# Altium PCB Unit.PcbDoc
Units mil, origin at the board's own origin, x right, y up, seen from the top; angles counter-clockwise.
Board outline 6000 x 4000 mil, 2 copper layers (Top Layer, Bottom Layer); 15 components, 19 nets, 271 pads, 0 vias.
Unrouted connection lines stored in the file: 45.
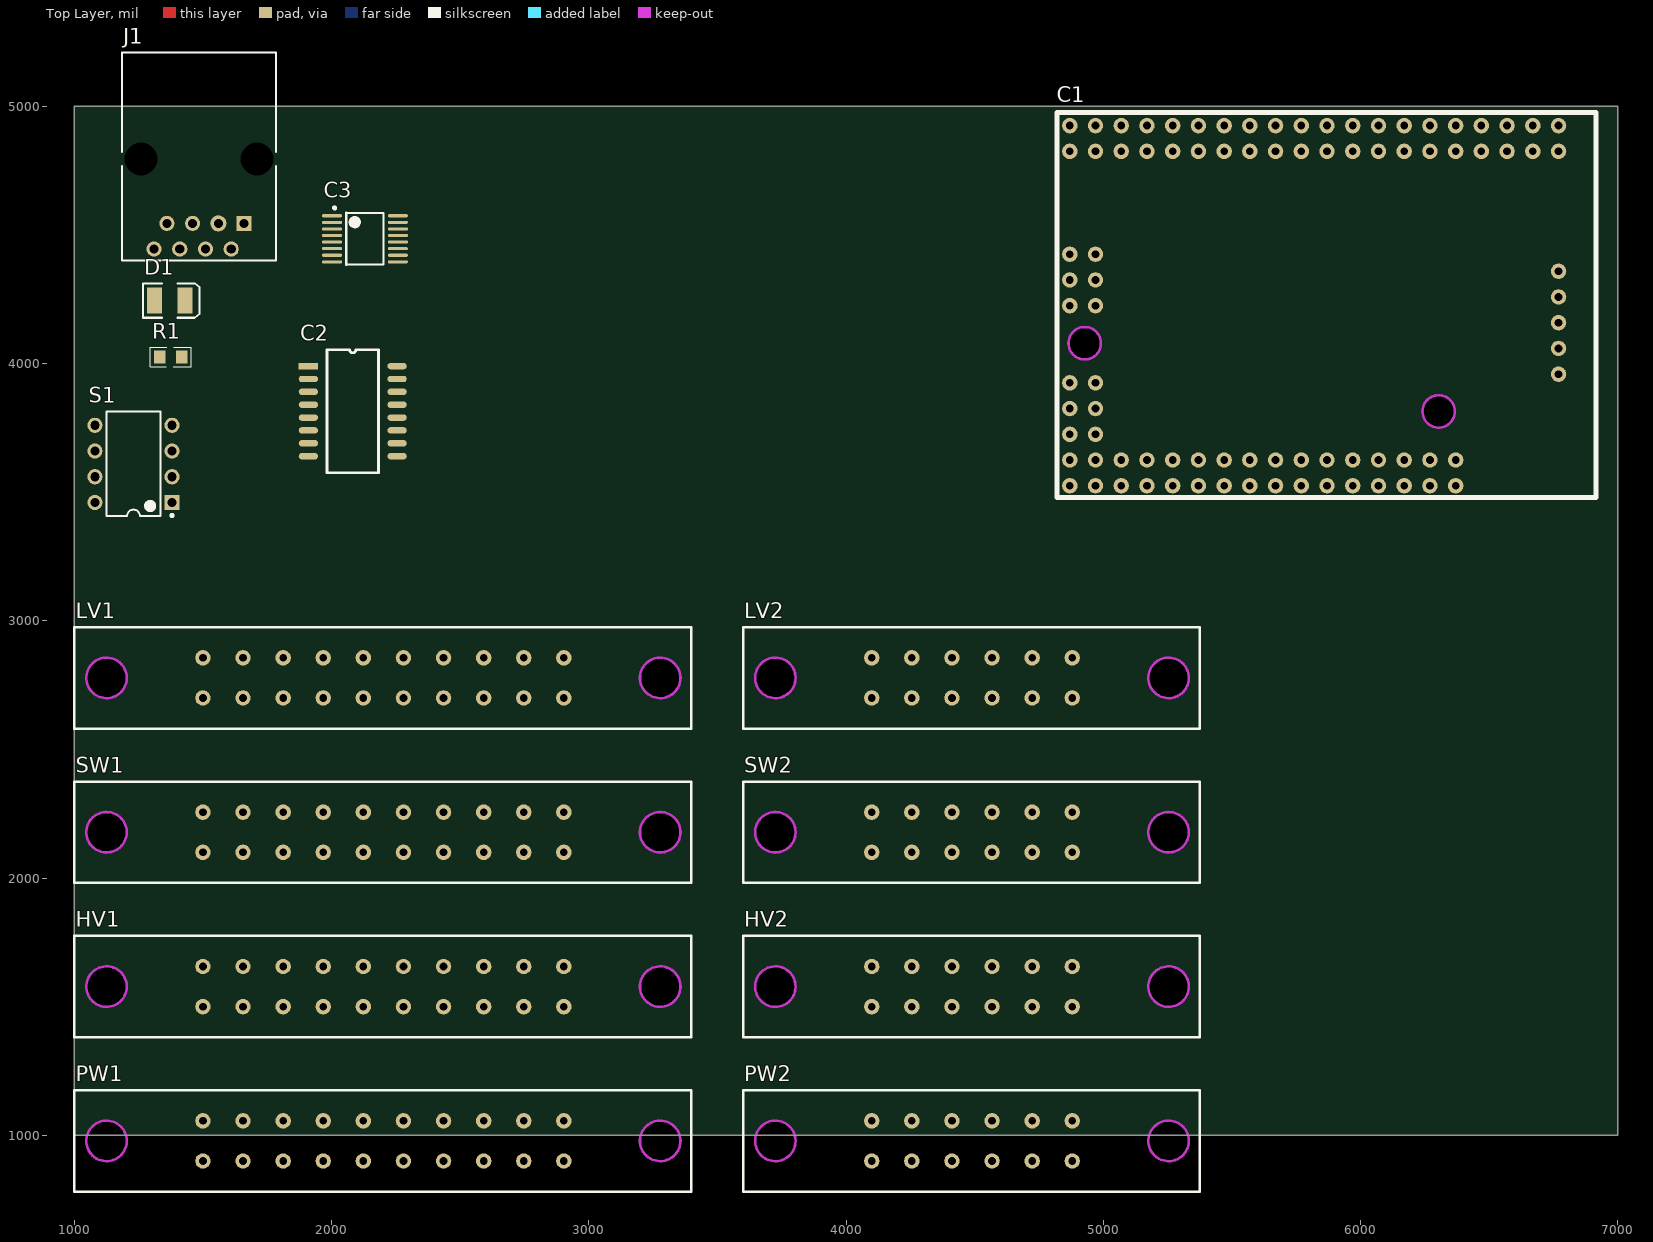
[diagram p0: Top Layer view]
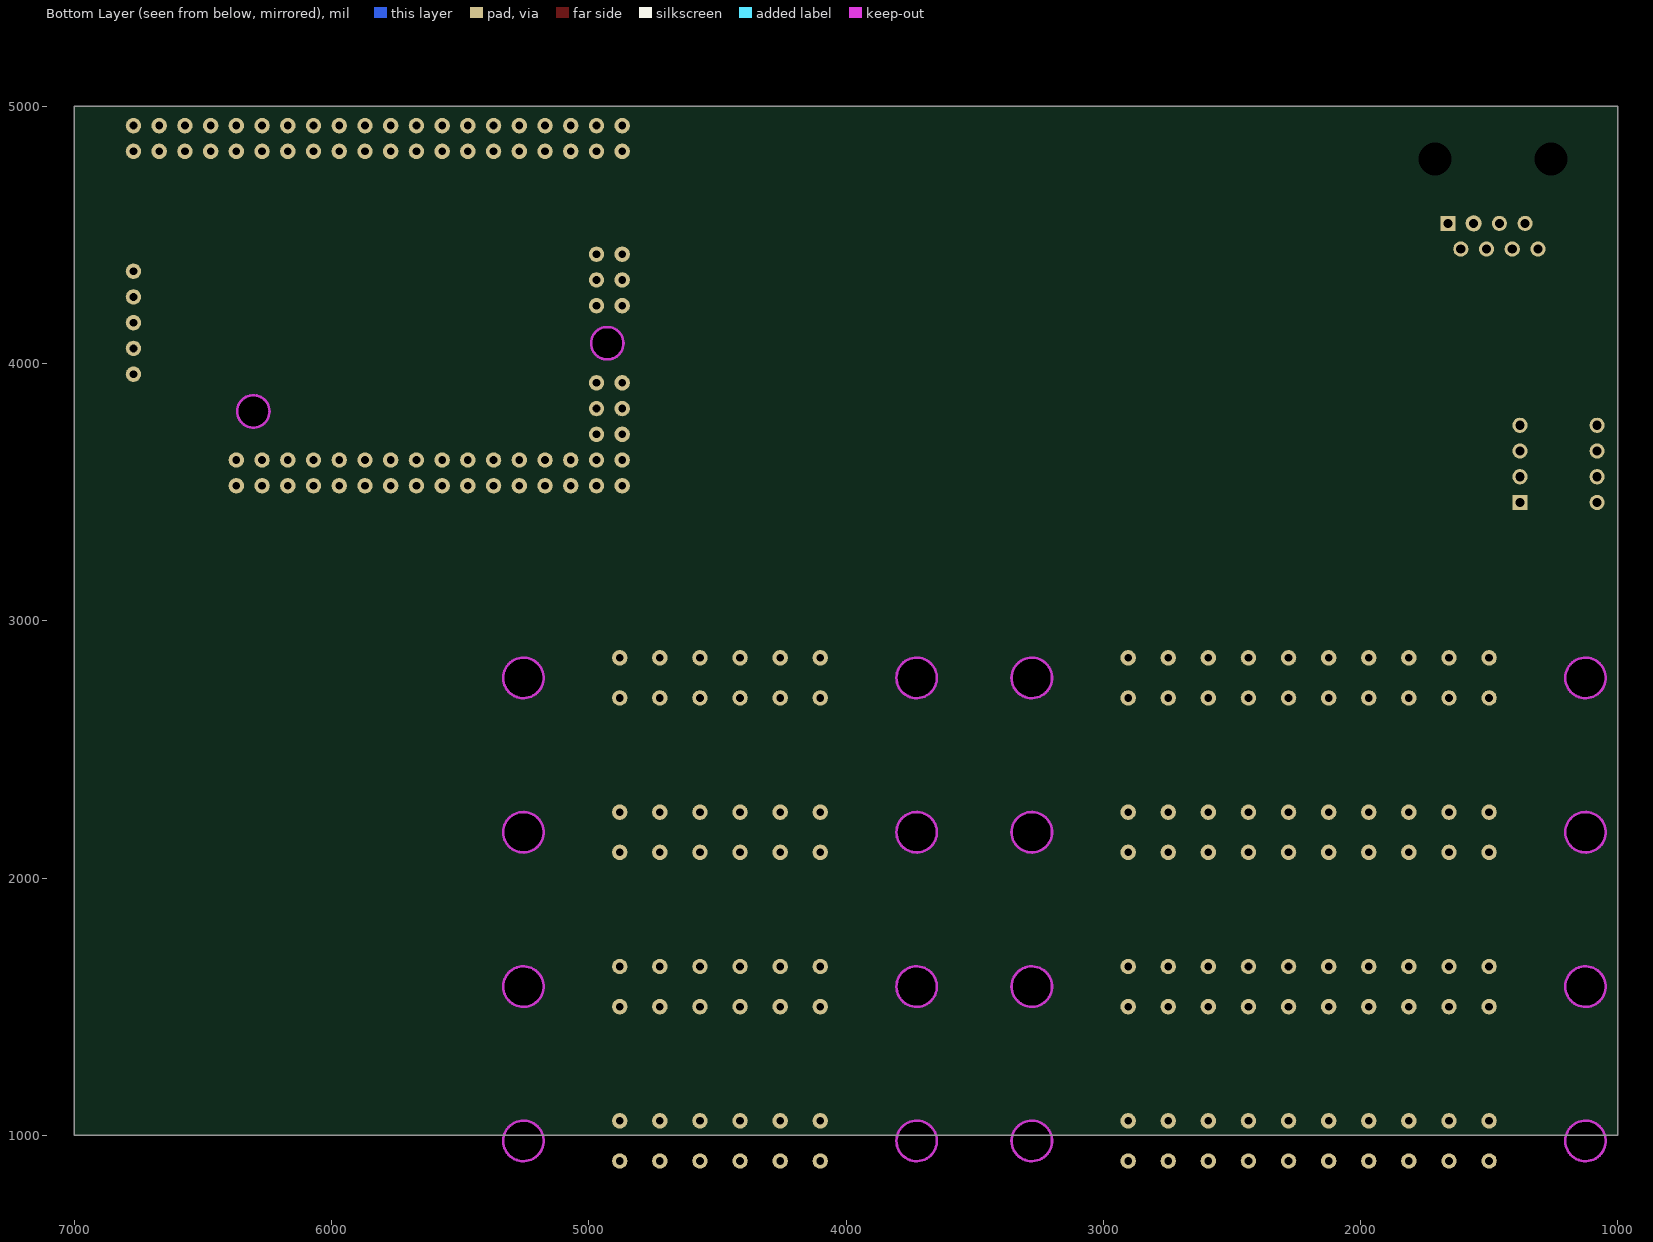
[diagram p1: Bottom Layer view, seen from below]

## Layer stack, top to bottom
Top Solder: solder mask 0.4, Solder Resist, Dk 3.5
Top Layer: signal copper 1.4
Dielectric 1: dielectric 12.6, FR-4, Dk 4.8
Bottom Layer: signal copper 1.4
Bottom Solder: solder mask 0.4, Solder Resist, Dk 3.5

## Board outline
1000,1000 7000,1000 7000,5000 1000,5000

## Design rules (kind name [scope] priority, off if disabled: settings)
Clearance [All] p1: gap=10 ignorepadtopadclearanceinfootprint=FALSE except(0: Arc-Hole Track-Hole SMDPad-Hole THPad-Hole Via-Hole Fill-Hole Poly-Hole Region-Hole Text-Hole)
PolygonConnect [All] p1: connectstyle=Relief reliefconductorwidth=10 reliefentries=4 polygonreliefangle="90 Angle" airgapwidth=10
RoutingVias [All] p1: holewidth=28 width=50 viastyle="Through Hole" minholewidth=28 minwidth=50 maxholewidth=28 maxwidth=50
SolderMaskExpansion [All] p1: expansion=4
Width [All] p1: maxlimit=10 minlimit=10 preferedwidth=10
30 further rules are at their usual default settings.

## Components (designator, comment, footprint, x,y, rotation, side; value= is the part's Value field where it differs from the comment)
C1 "Mega 2560 mini" "Mega 2560 mini" 4870,4925 r270 top
C2 "MAX3095" SOP16 1910,3990 r0 top
C3 "MAX3045" TSSOP-16 2130,4485 r0 top
D1 "LED3" 3.5X2.8X1.9 1370.94,4245 r0 top
HV1 "BTB-805-20P" BTB-805-20P 1500,1500 r0 top
HV2 "BTB-805-12P" BTB-805-12P 4100,1500 r0 top
J1 "15-43-6233" 15-43-6233 1485,5210 r180 top
LV1 "BTB-805-20P" BTB-805-20P 1500,2700 r0 top
LV2 "BTB-805-12P" BTB-805-12P 4100,2700 r0 top
PW1 "BTB-805-20P" BTB-805-20P 1500,900 r0 top
PW2 "BTB-805-12P" BTB-805-12P 4100,900 r0 top
R1 "0.33k" R0805 1375,4025 r0 top
S1 "SW-DIP4" DIP-8 1230,3610 r180 top
SW1 "BTB-805-20P" BTB-805-20P 1500,2100 r0 top
SW2 "BTB-805-12P" BTB-805-12P 4100,2100 r0 top

## Footprints (in the part's own frame and the unit in brackets; to place one, negate y for a bottom-side part, rotate by r counter-clockwise, add the part's x,y. Pads: shape width x height; smd on the part's side, far side on the other; paste and mask are expansions set on the pad)
3.5X2.8X1.9 [mm] "SM LED; 2 C-Bend Leads; Body 3.5 x 2.8 x 1.9 mm, inc leads (LxWxH typ)"
  rect 1.5x2.6 smd: 1(-1.5,0) 2(1.5,0)
  silkscreen extent -2.65,-1.7 2.95,1.7
15-43-6233 [mm] "Connector; PCB Jack, Thru-Hole; 1-Port; Unshielded without Lightpipes; Right Angle"
  rect 1.5x1.5 hole 0.9: 1(-4.445,16.89)
  round 1.5 hole 0.9: 2(-3.175,19.43) 4(-0.635,19.43) 5(0.635,16.89) 6(1.905,19.43) 7(3.175,16.89) 8(4.445,19.43)
  round 1.6 hole 0.9: 3(-1.905,16.89)
  round 2.95 hole 3.25 unplated: MH1(-5.715,10.54) MH2(5.715,10.54)
  silkscreen extent -7.62,0 7.62,20.58
BTB-805-12P [mil]
  round 60 hole 30: 1(0,0) 2(0,155.91) 3(155.91,0) 4(155.91,155.91) 5(311.81,0) 6(311.81,155.91) 7(467.72,0) 8(467.72,155.91) 9(623.62,0) 10(623.62,155.91) 11(779.53,0) 12(779.53,155.91)
  Keep-Out Layer board cut-out: 1075.39,77.95 1081.39,47.82 1098.46,22.28 1124,5.21 1154.13,-0.79 1154.13,-0.79 1184.27,5.21 1209.81,22.28 1226.88,47.82 1232.87,77.95 1232.87,77.95 1226.88,108.09 1209.81,133.63 1184.27,150.7 1154.13,156.69 1154.13,156.69 1124,150.7 1098.46,133.63 1081.39,108.09 1075.39,77.95
  Keep-Out Layer board cut-out: -374.61,-0.79 -404.74,5.21 -430.28,22.28 -447.35,47.82 -453.35,77.95 -453.35,77.95 -447.35,108.09 -430.28,133.63 -404.74,150.7 -374.61,156.69 -374.61,156.69 -344.47,150.7 -318.93,133.63 -301.86,108.09 -295.87,77.95 -295.87,77.95 -301.86,47.82 -318.93,22.28 -344.47,5.21 -374.61,-0.79
  Keep-Out Layer circle w10: c-374.61,77.95 r78.74
  Keep-Out Layer circle w10: c1154.13,77.95 r78.74
  silkscreen extent -500,-119 1275,275
BTB-805-20P [mil]
  round 60 hole 30: 1(0,0) 2(0,155.91) 3(155.91,0) 4(155.91,155.91) 5(311.81,0) 6(311.81,155.91) 7(467.72,0) 8(467.72,155.91) 9(623.62,0) 10(623.62,155.91) 11(779.53,0) 12(779.53,155.91) 13(935.43,0) 14(935.43,155.91) 15(1091.34,0) 16(1091.34,155.91) 17(1247.24,0) 18(1247.24,155.91) 19(1403.15,0) 20(1403.15,155.91)
  Keep-Out Layer board cut-out: -374.61,-0.79 -404.74,5.21 -430.28,22.28 -447.35,47.82 -453.35,77.95 -453.35,77.95 -447.35,108.09 -430.28,133.63 -404.74,150.7 -374.61,156.69 -374.61,156.69 -344.47,150.7 -318.93,133.63 -301.86,108.09 -295.87,77.95 -295.87,77.95 -301.86,47.82 -318.93,22.28 -344.47,5.21 -374.61,-0.79
  Keep-Out Layer board cut-out: 1699.02,77.95 1705.01,47.82 1722.08,22.28 1747.62,5.21 1777.76,-0.79 1777.76,-0.79 1807.89,5.21 1833.43,22.28 1850.5,47.82 1856.5,77.95 1856.5,77.95 1850.5,108.09 1833.43,133.63 1807.89,150.7 1777.76,156.69 1777.76,156.69 1747.62,150.7 1722.08,133.63 1705.01,108.09 1699.02,77.95
  Keep-Out Layer circle w10: c1777.76,77.95 r78.74
  Keep-Out Layer circle w10: c-374.61,77.95 r78.74
  silkscreen extent -500,-119 1899,275
DIP-8 [mm] "DIP; 8 Leads; Row Spacing 7.62 mm; Pitch 2.54 mm"
  rect 1.5x1.5 hole 0.9: 1(-3.81,3.81)
  round 1.5 hole 0.9: 2(-3.81,1.27) 3(-3.81,-1.27) 4(-3.81,-3.81) 5(3.81,-3.81) 6(3.81,-1.27) 7(3.81,1.27) 8(3.81,3.81)
  silkscreen extent -3.94,-5.15 2.65,5.23, body extent -3.6,-5.15 3.6,5.15, height 5.08
"Mega 2560 mini" [mil]
  round 60 hole 30: 0(1400,1500) 1(1300,1500) 2(1400,1400) 3(1300,1400) 4(1400,1300) 5(1300,1300) 6(1400,1200) 7(1300,1200) 8(1400,1100) 9(1300,1100) 10(1400,1000) 11(1300,1000) 12(1400,900) 13(1300,900) 14(1400,800) 15(1300,800) 16(100,1500) 17(0,1500) 18(100,1400) 19(0,1400) 20(100,1300) 21(0,1300) 22(100,1200) 23(0,1200) 24(100,1100) 25(0,1100) 26(100,1000) 27(0,1000) 28(100,900) 29(0,900) 30(100,800) 31(0,800) 32(100,700) 33(0,700) 34(100,600) 35(0,600) 36(100,500) 37(0,500) 38(100,400) 39(0,400) 40(100,300) 41(0,300) 42(100,200) 43(0,200) 44(100,100) 45(0,100) 46(100,0) 47(0,0) 48(1400,700) 49(1300,700) 50(1400,600) 51(1300,600) 52(1400,500) 53(1300,500) 54(1400,400) 55(1300,400) 56(1400,300) 57(1300,300) 58(1400,200) 59(1300,200) 60(1400,100) 61(1300,100) 62(1400,0) 63(1300,0) 64(566.14,1900) 65(666.14,1900) 66(766.14,1900) 67(866.14,1900) 68(966.14,1900) 69(700,0) 70(700,100) 71(600,0) 72(600,100) 73(500,0) 74(500,100) 75(100,1600) 76(0,1600) 77(100,1700) 78(0,1700) 79(100,1800) 80(0,1800) 81(100,1900) 82(0,1900) 83(1200,0) 84(1200,100) 85(1100,0) 86(1100,100) 87(1000,0) 88(1000,100)
  Keep-Out Layer board cut-out: 783.01,58 787.8,33.89 801.46,13.46 821.89,-0.2 846,-4.99 846,-4.99 870.11,-0.2 890.54,13.46 904.2,33.89 908.99,58 908.99,58 904.2,82.11 890.54,102.54 870.11,116.2 846,120.99 846,120.99 821.89,116.2 801.46,102.54 787.8,82.11 783.01,58
  Keep-Out Layer board cut-out: 1111,1371.01 1086.89,1375.8 1066.46,1389.46 1052.8,1409.89 1048.01,1434 1048.01,1434 1052.8,1458.11 1066.46,1478.54 1086.89,1492.2 1111,1496.99 1111,1496.99 1135.11,1492.2 1155.54,1478.54 1169.2,1458.11 1173.99,1434 1173.99,1434 1169.2,1409.89 1155.54,1389.46 1135.11,1375.8 1111,1371.01
  Keep-Out Layer circle w10: c846,58 r62.99
  Keep-Out Layer circle w10: c1111,1434 r62.99
  silkscreen extent -50,-50 1446,2046
R0805 [mm]
  rect 1.15x1.3 smd: 1(-1.1,0) 2(1.1,0)
  silkscreen extent -2.01,-0.94 2.01,0.97, body extent -1,-0.61 1,0.6, height 0.5
SOP16 [mil]
  rect 75x25 smd: 1(0,0)
  oval 75x25 smd: 2(0,-50) 3(0,-100) 4(0,-150) 5(0,-200) 6(0,-250) 7(0,-300) 8(0,-350) 9(345,-350) 10(345,-300) 11(345,-250) 12(345,-200) 13(345,-150) 14(345,-100) 15(345,-50) 16(345,0)
  silkscreen extent 72,-414 272,64
TSSOP-16 [mm]
  oval 2x0.3 smd: 1(-3.25,2.275) 2(-3.25,1.625) 3(-3.25,0.975) 4(-3.25,0.325) 5(-3.25,-0.325) 6(-3.25,-0.975) 7(-3.25,-1.625) 8(-3.25,-2.275) 9(3.25,-2.275) 10(3.25,-1.625) 11(3.25,-0.975) 12(3.25,-0.325) 13(3.25,0.325) 14(3.25,0.975) 15(3.25,1.625) 16(3.25,2.275)
  silkscreen extent -3.12,-2.55 1.83,3.17, body extent -2.85,-2.56 2.85,2.54, height 1.45

## Part data
D1: "Typical BLUE SiC LED", DatasheetVersion=16-Apr-2002, LatestRevisionDate=17-Dec-2003, LatestRevisionNote="PCB Footprint replaced.", PackageDescription="SM LED; 2 C-Bend Leads; Body 3.5 x 2.8 x 1.9 mm, inc leads (LxWxH typ)", PackageReference=3.5X2.8X1.9, PackageVersion=16-Apr-2002, Published=8-Jun-2000, Publisher="Altium Limited"
J1: "Right Angle, Standard Profile, RJ45-Keyed, Flange Mount PCB Jack", PackageDocument=18-Dec-2001, ComponentAvailability=Obsolete, ComponentLink1Description="Manufacturer Link", ComponentLink1URL=http://www.molex.com/, ComponentLink2Description=Datasheet, ComponentLink2URL=http://www.molex.com/cmc_upload/common_files/1212003_catalogmx41314.pdf, ComponentLink3Description="Iges Model", ComponentLink3URL=http://www.molex.com/pdm_docs/igs/15-43-6233_igs.zip, DatasheetDocument=18-Dec-2001, DrillSize="Nominal, Rounded to nearest 0.05mm", PackageReference=15-43-6233, PCB_Layout="Complies with Manufacturer's Recommendation.", PCB_Mounting=Thru-Hole, PerformanceCategory=3, Ports=1, Positions/Loaded="Port1 - 8 Keyed/8", Published=25-Jun-2002, Publisher="Altium Limited"
R1: library part Resistance
S1: "DIP Switch", LatestRevisionDate=17-Jul-2002, LatestRevisionNote="Re-released for DXP Platform.", PackageReference=DIP-8, Published=24-Mar-1999, Publisher="Altium Limited"

## Nets (pads, with @x,y where several pads share a name; then routed paths per layer and width w, separated by ;. In a path a pad name is that pad's centre, name@x,y a point inside that pad or via, vN(x,y) a via of type N, cw(c..) or ccw(c..) an arc to the next point about the centre after c; other vN are vias at no path point)
+5: C1.77 C1.78 C2.4 C2.16 C3.4 C3.16 HV2.11 HV2.12 LV2.11 LV2.12 S1.5 S1.6 S1.7 S1.8 SW2.11 SW2.12
+12: C1.81 C1.82 PW2.11 PW2.12
GND: C1.79 C1.80 C2.8 C3.8 HV2.9 HV2.10 LV2.9 LV2.10 PW2.9 PW2.10 SW2.9 SW2.10
IDS1: C1.60 S1.1
IDS2: C1.61 S1.2
IDS3: C1.62 S1.3
IDS4: C1.63 S1.4
MISO: C3.3 J1.4
MISO+: C3.2 J1.3
MOSI: C2.2 J1.2
MOSI+: C2.1 J1.1
NetC1_85: C1.85 C2.3
NetC1_86: C1.86 C3.1
NetC1_87: C1.87 C2.5
NetD1_1: D1.1 J1.8
NetD1_2: D1.2 R1.2
SCLK: C2.7 J1.6
SCLK+: C2.6 J1.5
SS: C1.88 R1.1
pads on no net: C1.0 C1.1 C1.2 C1.3 C1.4 C1.5 C1.6 C1.7 C1.8 C1.9 C1.10 C1.11 C1.12 C1.13 C1.14 C1.15 C1.16 C1.17 C1.18 C1.19 C1.20 C1.21 C1.22 C1.23 C1.24 C1.25 C1.26 C1.27 C1.28 C1.29 C1.30 C1.31 C1.32 C1.33 C1.34 C1.35 C1.36 C1.37 C1.38 C1.39 C1.40 C1.41 C1.42 C1.43 C1.44 C1.45 C1.46 C1.47 C1.48 C1.49 C1.50 C1.51 C1.52 C1.53 C1.54 C1.55 C1.56 C1.57 C1.58 C1.59 C1.64 C1.65 C1.66 C1.67 C1.68 C1.69 C1.70 C1.71 C1.72 C1.73 C1.74 C1.75 C1.76 C1.83 C1.84 C2.9 C2.10 C2.11 C2.12 C2.13 C2.14 C2.15 C3.5 C3.6 C3.7 C3.9 C3.10 C3.11 C3.12 C3.13 C3.14 C3.15 HV1.1 HV1.2 HV1.3 HV1.4 HV1.5 HV1.6 HV1.7 HV1.8 HV1.9 HV1.10 HV1.11 HV1.12 HV1.13 HV1.14 HV1.15 HV1.16 HV1.17 HV1.18 HV1.19 HV1.20 HV2.1 HV2.2 HV2.3 HV2.4 HV2.5 HV2.6 HV2.7 HV2.8 J1.7 J1.MH1 J1.MH2 LV1.1 LV1.2 LV1.3 LV1.4 LV1.5 LV1.6 LV1.7 LV1.8 LV1.9 LV1.10 LV1.11 LV1.12 LV1.13 LV1.14 LV1.15 LV1.16 LV1.17 LV1.18 LV1.19 LV1.20 LV2.1 LV2.2 LV2.3 LV2.4 LV2.5 LV2.6 LV2.7 LV2.8 PW1.1 PW1.2 PW1.3 PW1.4 PW1.5 PW1.6 PW1.7 PW1.8 PW1.9 PW1.10 PW1.11 PW1.12 PW1.13 PW1.14 PW1.15 PW1.16 PW1.17 PW1.18 PW1.19 PW1.20 PW2.1 PW2.2 PW2.3 PW2.4 PW2.5 PW2.6 PW2.7 PW2.8 SW1.1 SW1.2 SW1.3 SW1.4 SW1.5 SW1.6 SW1.7 SW1.8 SW1.9 SW1.10 SW1.11 SW1.12 SW1.13 SW1.14 SW1.15 SW1.16 SW1.17 SW1.18 SW1.19 SW1.20 SW2.1 SW2.2 SW2.3 SW2.4 SW2.5 SW2.6 SW2.7 SW2.8